# EAGLE board wifiboard-v2-etch (EAGLE 7.5.0)
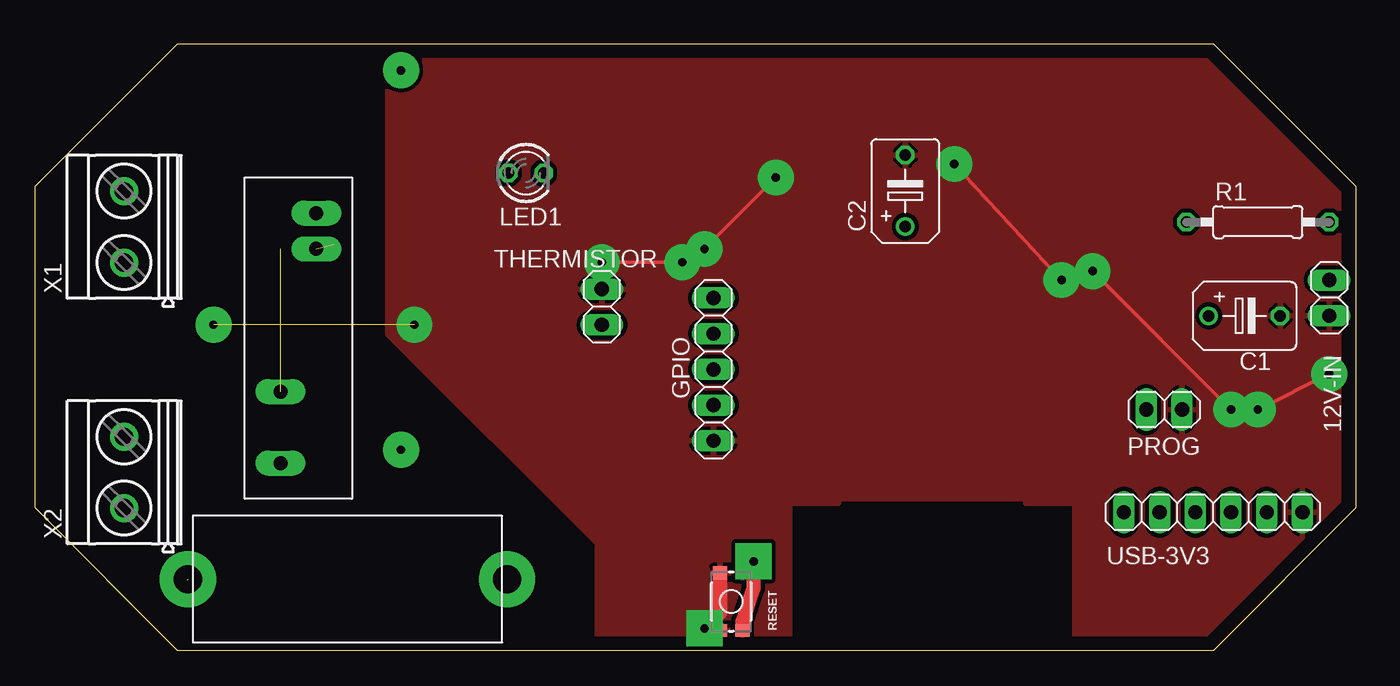
[diagram p0: board, top side]
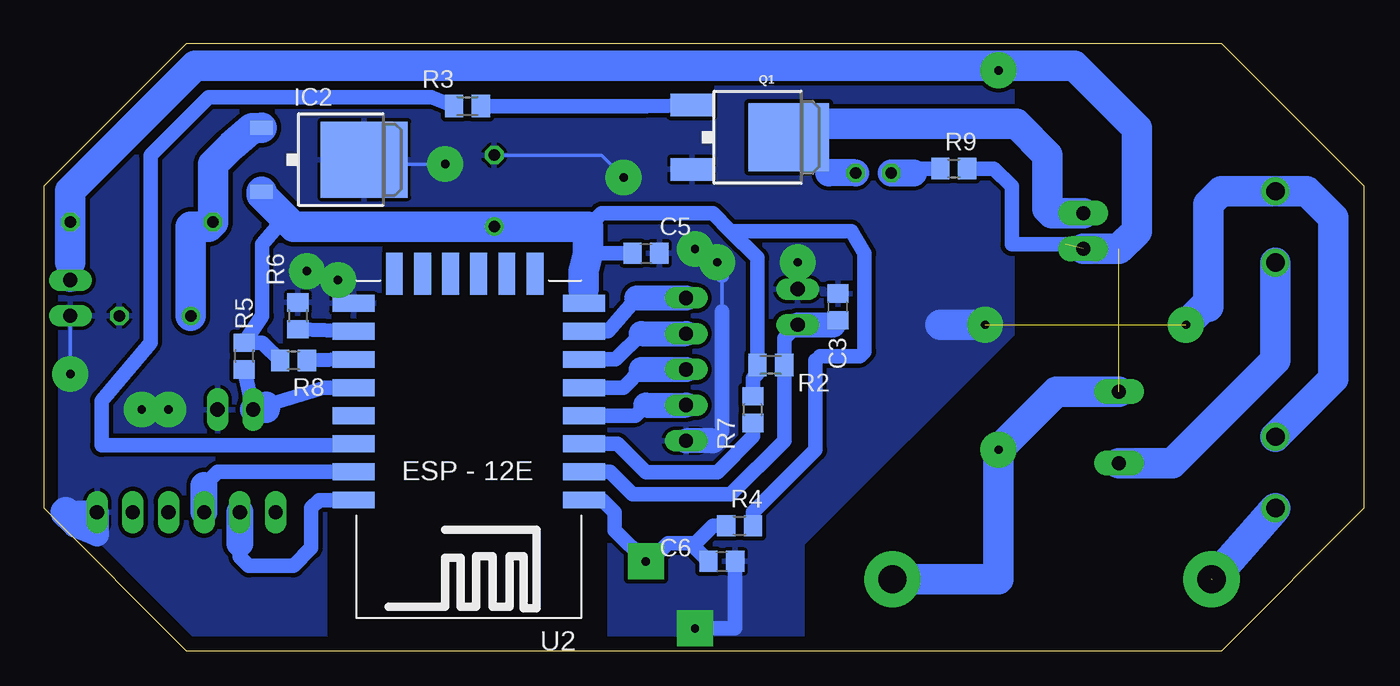
[diagram p1: board, bottom side, seen from below]

Size 93.98 x 43.18 mm. Coordinates in mm from the lower left corner, seen from the top.
Outline: 10.16,0 0,10.16 0,33.02 10.16,43.18 83.82,43.18 93.98,33.02 93.98,10.16 83.82,0 10.16,0
Copper layers (1*16): Top 0.035mm / dielectric 1.5mm / Bottom 0.035mm
Design rules "default *": minimum track width 10mil, minimum drill 24mil, track to track 12mil, track to pad 12mil, pad to pad 12mil, via to via 12mil, smd to smd 8mil, copper to edge 40mil, drill to drill 8mil, minimum pad ring 10mil, minimum via ring 8mil, stop-mask expansion 4mil, vias tented up to drill 0mil, thermal gap 10mil

## Footprints (pad centres in the part's own frame; a part is rotated, then mirrored left to right if it is on the bottom)
1X02 = drill 1.016 long: 1 -1.27,0; 2 1.27,0
B45181B = drill 0.813: + -2.54,0 | drill 0.813 octagon: - 2.54,0
C0805 = smd 1.3 x 1.5: 1 -0.95,0; 2 0.95,0
1X05 = drill 1.016 long: 1 -5.08,0; 2 -2.54,0; 3 0,0; 4 2.54,0; 5 5.08,0
TO252 = smd 1 x 1.6: 1 -2.28,-4.8; 2 2.28,-4.8 | smd 5.4 x 6.2: 3 0,2.5
LED3MM = drill 0.813 octagon: A -1.27,0; K 1.27,0
DPAK = smd 1.6 x 3: 1 -2.28,-5.31; 3 2.28,-5.31 | smd 4.826 x 5.715: 4 0,1.588
0207/10 = drill 0.813 octagon: 1 -5.08,0; 2 5.08,0
M0805 = smd 1.3 x 1.6: 1 -0.95,0; 2 0.95,0
R0805 = smd 1.3 x 1.5: 1 -0.95,0; 2 0.95,0
TACTILE_SWITCH_SMD_4.6X2.8MM = smd 0.9 x 1: 1 -2.05,-0.8; 2 2.05,-0.8; 3 2.05,0.8; 4 -2.05,0.8
ESP12E-SMD = smd 3 x 1.2: ADC -8.3,3.8; CH_PD -8.3,1.8; GND 8.1,-8.2; GPIO0 8.1,-2.2; GPIO2 8.1,-4.2; GPIO4 8.1,-0.2; GPIO5 8.1,1.8; GPIO12 -8.3,-4.2; GPIO13 -8.3,-6.2; GPIO14 -8.3,-2.2; GPIO15 8.1,-6.2; GPIO16 -8.3,-0.2; RESET -8.3,5.8; RXD0 8.1,3.8; TXD0 8.1,5.8; VCC -8.3,-8.2 | smd 1.2 x 3: CS0 -4.8,-10.3; GPIO9 -0.8,-10.3; GPIO10 1.2,-10.3; MISO -2.8,-10.3; MOSI 3.2,-10.3; SCLK 5.2,-10.3
FUSE = drill 2 pad 4: P$1 11.35,0; P$2 -11.35,0
OMRON-G6DS-1A-H = drill 1 pad 1.778 long: P$1 0,2.54; P$2 2.54,2.54; P$3 12.7,0; P$4 17.78,0
1X06 = drill 1.016 long: 1 -6.35,0; 2 -3.81,0; 3 -1.27,0; 4 1.27,0; 5 3.81,0; 6 6.35,0
MKDSN1,5/2-5,08 = drill 1.3 pad 2: 1 -2.561,0.025; 2 2.519,0.025

## Placement (x,y rotation side)
12V-IN  [1X02]  92.08,25.08 270 top
C1  1000uF  [B45181B]  86.04,23.81 0 top
C2  1000uF  [B45181B]  61.91,32.7 90 top
C3  1uF  [C0805]  37.47,24.45 90 bottom
C5  0.1u  [C0805]  51.12,28.26 0 bottom
C6  0.1u  [C0805]  45.72,6.35 0 bottom
GPIO  [1X05]  48.26,20 270 top
IC2  78033AF  [TO252]  73.66,34.92 270 bottom
LED1  [LED3MM]  34.92,33.97 0 top
PROG  [1X02]  80.33,17.14 0 top
Q1  FDD8870  [DPAK]  42.55,36.51 270 bottom
R1  6R8  [0207/10]  87,30.48 0 top
R2  10K  [M0805]  42.23,20.32 0 bottom
R3  10K  [M0805]  63.82,38.73 180 bottom
R4  10K  [R0805]  44.45,8.89 0 bottom
R5  10K  [R0805]  79.69,20.95 90 bottom
R6  10K  [R0805]  75.88,23.81 270 bottom
R7  10K  [R0805]  43.5,17.14 90 bottom
R8  10K  [R0805]  76.2,20.64 180 bottom
R9  1K  [R0805]  29.21,34.29 0 bottom
RESET  [TACTILE_SWITCH_SMD_4.6X2.8MM]  49.53,3.49 90 top
THERMISTOR  [1X02]  40.32,24.45 270 top
U2  [ESP12E-SMD]  63.82,16.51 180 bottom
U$1  FUSE  [FUSE]  22.23,5.08 0 top
U$2  OMRON-G6DS  [OMRON-G6DS-1A-H]  17.46,31.11 270 top
USB-3V3  [1X06]  83.82,9.84 180 top
X1  AC-N  [MKDSN1,5/2-5,08]  6.35,30.16 90 top
X2  AC-L  [MKDSN1,5/2-5,08]  6.35,12.7 90 top

## Library data of the parts
12V-IN GPIO PROG THERMISTOR USB-3V3 = pinhead
C1-C3 C5 C6 R1-R9 = rcl
IC2 = adafruit
LED1 = led
Q1 = SparkFun-DiscreteSemi; PROD_ID: TRANS-09984
RESET = SparkFun-Switches; PROD_ID: SWCH-13065
U2 = esp8266modules
U$1 U$2 = alexa
X1 X2 = con-phoenix-508

## Nets
0: PROG.1 R5.1 U2.GPIO0
2: R8.1 U2.GPIO2
5: R3.2 U2.GPIO5
12: GPIO.2 U2.GPIO12
13: GPIO.1 U2.GPIO13
14: GPIO.3 U2.GPIO14
15: R6.2 U2.GPIO15
16: GPIO.4 U2.GPIO16
+3V3: C2.+ C5.1 IC2.2 R2.1 R4.2 R5.2 R7.2 R8.2 U2.VCC
+12V: 12V-IN.1 R1.2 R9.2 U$1.P$1 U$2.P$2 U$2.P$3
A0: C3.1 R2.2 THERMISTOR.2 U2.ADC
CH_PD: R7.1 U2.CH_PD
GND: 12V-IN.2 C1.- C2.- C3.2 C5.2 C6.2 GPIO.5 IC2.3 PROG.2 Q1.3 R6.1 RESET.3 RESET.4 THERMISTOR.1 U2.GND USB-3V3.1 X1.2 X2.2
N$2: C1.+ IC2.1 R1.1
N$5: Q1.1 R3.1
N$7: LED1.K Q1.4 U$2.P$1
N$10: U$2.P$4 X1.1
N$12: U$1.P$2 X2.1
N$14: LED1.A R9.1
RST: C6.1 R4.1 RESET.1 RESET.2 U2.RESET
RX: U2.RXD0 USB-3V3.4
TX: U2.TXD0 USB-3V3.5

## Tracks (layer width: path | path; a pad name or v marks a point on that pad's centre or on a via)
0
  Bottom 1.016: U2.GPIO0 74,18.71 78.11,17.46 | R5.1 PROG.1
  Bottom 1.93: 78.11,17.46 78.11,17.14 PROG.1
2
  Bottom 1.016: U2.GPIO2 R8.1
5
  Bottom 1.016: U2.GPIO5 72.02,14.61 89.85,14.61 89.85,17.78 86.36,21.91 86.36,35.24 82.23,39.37 66.36,39.37 R3.2
12
  Bottom 1.016: U2.GPIO12 53.27,20.71 51.44,22.54
  Bottom 1.778: 51.44,22.54 GPIO.2
13
  Bottom 1.016: U2.GPIO13 53.81,22.71 51.75,25.08
  Bottom 1.778: 51.75,25.08 GPIO.1
14
  Bottom 1.016: U2.GPIO14 52.73,18.71 51.44,20
  Bottom 1.778: 51.44,20 GPIO.3
15
  Bottom 1.016: U2.GPIO15 R6.2
16
  Bottom 1.016: U2.GPIO16 51.87,16.71 51.12,17.46
  Bottom 1.778: 51.12,17.46 GPIO.4
+3V3
  Bottom 1.016: 55.56,25.72 55.56,24.75 U2.VCC 55.46,24.77 | C5.1 55.24,28.26 | R7.2 43.5,19.37 43.18,19.69 R2.1 43.18,27.94 45.09,29.84 | 55.24,30.16 54.29,31.11 46.35,31.11 45.09,29.84 | R4.2 43.5,9.84 39.05,14.29 39.05,20.64 38.73,20.95 35.88,20.95 35.56,21.27 35.56,28.26 36.51,29.84 45.09,29.84 | R8.2 78.42,21.91 R5.2 78.42,23.81 78.42,28.89 76.83,30.8
  Bottom 2.184: IC2.2 78.46,32.42 76.83,30.8 76.2,30.16 C2.+ 55.24,30.16 55.24,28.26 55.56,26.99 55.56,25.72
+12V  (via drill 0.6 pad 2.54)  (2 unrouted)
  Bottom 1.016: 21.27,28.89 25.08,28.89 25.08,33.02 26.35,34.29 R9.2
  Bottom 1.676: 92.08,27.62 12V-IN.1
  Bottom 2.184: 92.08,27.62 R1.2 92.08,32.7 83.19,41.59 25.72,41.59 | 25.72,41.59 20.64,41.59 16.19,37.15 16.19,29.84 17.46,28.57 U$2.P$2 | v26.04,41.27 25.72,41.59 | U$1.P$1 26.04,5.08 v26.04,14.29 21.91,18.41 U$2.P$3
A0
  Bottom 1.016: U2.ADC 53.67,12.71 52.07,11.11 45.09,11.11 41.27,14.92 41.28,14.93 R2.2 41.28,22.22 THERMISTOR.2 | 37.78,23.18 C3.1
  Bottom 1.778: THERMISTOR.2 37.78,23.18
CH_PD
  Bottom 1.016: U2.CH_PD 53.13,14.71 51.12,12.7 46.04,12.7 43.5,15.24 R7.1
GND  (via drill 0.6 pad 2.54)  (1 unrouted)
  Top 0.254: v92.08,19.68 v87,17.14 | v73.03,26.35 v65.41,34.61 | v47.62,28.57 v52.7,33.66 | v40.32,27.62 v46.04,27.62 | v75.25,26.99 v85.09,17.14
  Top 1.016: RESET.4 48.27,1.91 v47.62,1.59 48.73,2.69 RESET.3
  Bottom 0.254: 12V-IN.2 v92.08,19.68 | v87,17.14 v85.09,17.14 | v65.41,34.61 70.84,34.61 IC2.3 | v75.25,26.99 v73.03,26.35 | 45.72,24.13 45.72,26.67 v47.62,28.57 | v52.7,33.66 54.29,35.24 C2.-
  Bottom 1.016: C6.2 44.77,1.59 v47.62,1.59 | 45.72,24.13 45.72,15.56 46.35,14.92 | THERMISTOR.1 v40.32,27.62 | v46.04,27.62 45.72,26.67
  Bottom 1.676: 91.92,9.37 91.44,9.84 USB-3V3.1 90.17,8.26 91.76,8.89
  Bottom 1.778: 46.35,14.92 GPIO.5
  Bottom 2.184: 92.39,9.84 91.92,9.37 | X2.2 2.22,19.32 2.22,30.8 4.11,32.68 X1.2 10.18,32.68 11.11,31.75 11.11,24.45 11.43,24.45 v12.7,23.18 | v26.99,23.18 30.16,23.18
  pour Bottom: 40.01,7.62 40.01,0 53.66,0 53.66,10.48 57.15,10.48 57.15,25.08 70.48,25.08 70.48,10.48 73.98,10.48 73.98,0 84.14,0 93.98,9.84 93.98,33.34 84.14,43.18 25.08,43.18 25.08,22.54
  pour Top: 40.01,7.62 40.01,0 53.66,0 53.66,10.48 57.15,10.48 57.15,10.79 70.48,10.79 70.48,10.48 73.98,10.48 73.98,0 84.14,0 93.98,9.84 93.98,33.34 84.14,43.18 25.08,43.18 25.08,22.54
N$2
  Bottom 2.184: IC2.1 79.15,37.15 80.64,35.88 81.92,34.61 R1.1 82.23,30.16 83.5,30.16 C1.+
N$5
  Bottom 1.016: R3.1 51.09,38.73 Q1.1
N$7
  Bottom 1.016: 38.1,33.97 Q1.4
  Bottom 1.676: 22.23,31.11 22.54,31.43
  Bottom 1.93: LED1.K 38.1,33.97
  Bottom 2.184: 22.54,31.43 22.54,35.24 24.77,37.47 40.96,37.47 Q1.4 | U$2.P$1 22.23,31.11
N$10
  Bottom 2.184: X1.1 6.33,20.66 13.65,13.34 U$2.P$4
N$12  (1 unrouted)
  Bottom 2.184: X2.1 10.82,5.06
N$14
  Bottom 1.016: 32.07,33.97 31.75,34.29 R9.1
  Bottom 1.93: LED1.A 32.07,33.97
RST  (via drill 0.6 pad 2.54)
  Top 1.016: RESET.2 51.14,5.71 v51.12,6.35 51.12,4.45 50.33,2.07 RESET.1
  Bottom 1.016: U2.RESET 54.21,10.71 53.34,9.84 53.34,8.57 v51.12,6.35 50.8,6.35 49.53,7.62 47.94,7.62 47.78,7.46 | 47.78,7.46 C6.1 | R4.1 46.35,8.89 47.78,7.46
RX
  Bottom 1.016: U2.RXD0 81.59,12.71 82.55,11.75
  Bottom 1.93: USB-3V3.4 82.55,11.75
TX
  Bottom 1.016: U2.TXD0 74.38,10.71 74.93,10.16 74.93,7.3 76.2,6.03 79.38,6.03 80.01,6.67 80.01,7.62
  Bottom 1.93: USB-3V3.5 80.01,7.62

## Text on the board
tValues: + | 13 | 12 | - | For connection / options see / documentation. | 14 | 16 | RELAY 613-2276 | G | FUSE